# Altium PCB USB_Translator.PcbDoc
Units mm, origin at the board's own origin, x right, y up, seen from the top; angles counter-clockwise.
Board outline 14 x 10.7 mm, 2 copper layers (Top Layer, Bottom Layer); 2 components, 6 nets, 24 pads, 10 vias.
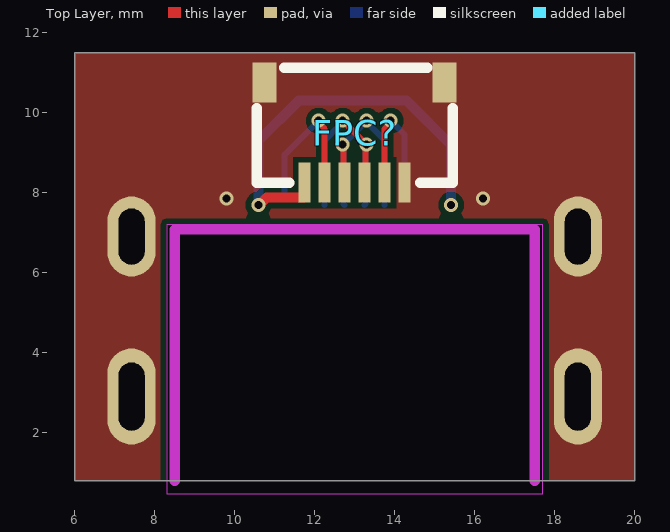
[diagram p0: Top Layer view]
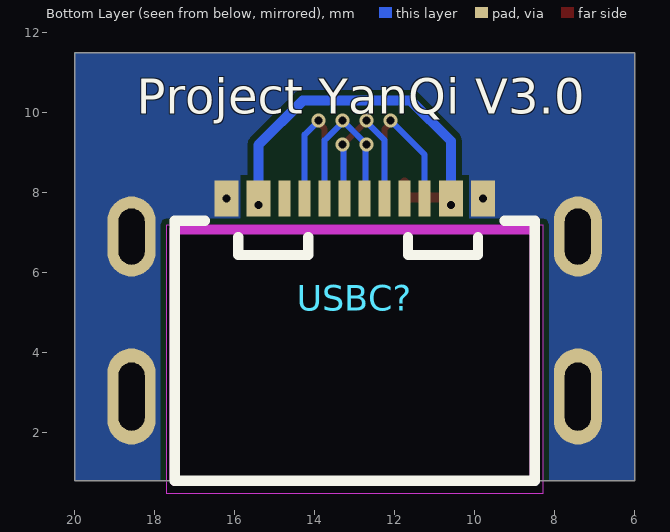
[diagram p1: Bottom Layer view, seen from below]

## Layer stack, top to bottom
Top Solder: solder mask 0.0102, Solder Resist, Dk 3.5
Top Layer: signal copper 0.0356
Dielectric 1: dielectric 0.32, FR-4, Dk 4.8
Bottom Layer: signal copper 0.0356
Bottom Solder: solder mask 0.0102, Solder Resist, Dk 3.5

## Board outline
6,0.8 20,0.8 20,11.5 6,11.5

## Design rules (kind name [scope] priority, off if disabled: settings)
Clearance Clearance_1 [OnMid vs OnMid] p1: gap=0.15 ignorepadtopadclearanceinfootprint=FALSE sourcerule=36 cellrowname=All cellrowtype=0 cellcolname=All cellcoltype=0 innerlayers=TRUE
Clearance Clearance_2 [(ExistsOnLayer('Top Layer') Or ExistsOnLayer('Bottom Layer')) vs (ExistsOnLayer('Top Layer') Or ExistsOnLayer('Bottom Layer'))] p2: gap=0.15 ignorepadtopadclearanceinfootprint=FALSE sourcerule=36 cellrowname=All cellrowtype=0 cellcolname=All cellcoltype=0 outerlayers=TRUE
Clearance [All] p3: gap=0.254 ignorepadtopadclearanceinfootprint=FALSE ismatrix=TRUE
PolygonConnect [All] p1: connectstyle=Direct reliefconductorwidth=0.254 reliefentries=4 polygonreliefangle="90 Angle" airgapwidth=0.254
RoutingVias [All] p1: holewidth=0.711 width=1.27 viastyle="Through Hole" minholewidth=0.711 minwidth=1.27 maxholewidth=0.711 maxwidth=1.27
SolderMaskExpansion [All] p1: expansion=0.102 istentingtop=FALSE
Width [All] p1: maxlimit=5 minlimit=0.15 preferedwidth=0.15 minimp=50.000000 maximp=50.000000 favimp=50.000000
30 further rules are at their usual default settings.

## Components (designator, comment, footprint, x,y, rotation, side; value= is the part's Value field where it differs from the comment)
FPC? "FH34SRJ-6S-0.5SH(50)" FFC-SMD_6P-P0.50_FH34SRJ-6S-0.5SH 13,9.5 r180 top locked
USBC? "918-418K2024S40000" USB-C-SMD_TYPE-C-USB-4 13,5.3 r180 bottom locked

## Footprints (in the part's own frame and the unit in brackets; to place one, negate y for a bottom-side part, rotate by r counter-clockwise, add the part's x,y. Pads: shape width x height; smd on the part's side, far side on the other; paste and mask are expansions set on the pad)
FFC-SMD_6P-P0.50_FH34SRJ-6S-0.5SH [mm]
  rect 0.3x1 smd: 1(1.25,1.25) 2(0.75,1.25) 3(0.25,1.25) 4(-0.25,1.25) 5(-0.75,1.25) 6(-1.25,1.25)
  rect 0.6x1 smd: 7(-2.25,-1.25) 8(2.25,-1.25)
  silkscreen extent -2.45,-1.63 2.45,1.25, body extent -2.5,-1.64 2.5,2.01, height 0.95
USB-C-SMD_TYPE-C-USB-4 [mm]
  oval 1.2x2 hole 0.65 slot 1.4 at 90 deg: 13(5.58,1.605) 16(-5.58,1.605)
  oval 1.2x2.4 hole 0.65 slot 1.7 at 90 deg: 14(5.58,-2.395) 15(-5.58,-2.395)
  rect 0.3x0.9 smd mask+0.051: A5(-1.25,2.55) A6(-0.25,2.55) A7(0.25,2.55) A8(1.25,2.55) B5(1.75,2.55) B6(0.75,2.55) B7(-0.75,2.55) B8(-1.75,2.55)
  rect 0.6x0.9 smd mask+0.051: A9B4(2.41,2.55) A12B1(3.21,2.55) B9A4(-2.41,2.55) B12A1(-3.21,2.55)
  Keep-Out Layer board cut-out: -4.699,-4.826 -4.699,1.905 4.699,1.905 4.699,-4.826
  Keep-Out Layer lines w0.254: 4.499,1.78 4.499,-4.501 4.499,1.78 ; 4.499,1.78 -4.5,1.78 ; -4.5,1.78 -4.5,-4.501 -4.5,1.78
  silkscreen extent -4.5,-4.5 4.5,2, body extent -5.77,-4.57 5.77,2.63, height 1.86

## Part data
FPC?: JLCPCB Part Class="Extended Part", LCSC Part Name="间距:0.5mm P数:6P 双侧触点/上下接", Manufacturer=HRS(广濑), Operating Temperature Range=-55℃~+105℃, Soldering Temperature(Max)=-, Add into BOM=yes, Contact Material=磷青铜, Contact Plating=金, Contact Type=双侧触点/上下接, Convert to PCB=yes, Datasheet=https://atta.szlcsc.com/upload/public/pdf/source/20180712/C224194_08937A353F43080B85824A8384727686.pdf, Device=FH34SRJ-6S-0.5SH(50), FFC, FCB Thickness=0.3mm, Height Above Board=1mm, Locking Feature=-, Manufacturer Part=FH34SRJ-6S-0.5SH(50), Mounting Type=卧贴, Number of Contacts=6P, Pitch=0.5mm, Supplier=LCSC, Supplier Footprint=SMD,P=0.5mm,卧贴, Supplier Part=C224194, Symbol=FH34SRJ-6S-0.5SH(50)
USBC?: JLCPCB Part Class="Extended Part", LCSC Part Name="Type-C 母座", Manufacturer=精拓金, Add into BOM=yes, Connector Type=Type-C, Convert to PCB=yes, Datasheet=https://atta.szlcsc.com/upload/public/pdf/source/20230504/AD68741A173EB676C7BDD03FFA4DE90F.pdf, Device=918-418K2024S40000, Gender=母座, Manufacturer Part=918-418K2024S40000, Name=918-418K2024S40000, Number of Contacts=16P, Number of Ports=1, Standard=-, Supplier=LCSC, Supplier Footprint=SMD, Supplier Part=C168688, Symbol="TYPE-C 3.1 MT 16P_C168688"

## Via types
v1: diameter 0.35, hole 0.2, Top Layer to Bottom Layer, tented both sides, 10 vias

## Nets (pads, with @x,y where several pads share a name; then routed paths per layer and width w, separated by ;. In a path a pad name is that pad's centre, name@x,y a point inside that pad or via, vN(x,y) a via of type N, cw(c..) or ccw(c..) an arc to the next point about the centre after c; other vN are vias at no path point)
GND: FPC?.6 FPC?.7 FPC?.8 USBC?.13 USBC?.14 USBC?.15 USBC?.16 USBC?.A12B1 USBC?.B12A1
  other v1: 9.79,7.85 16.21,7.85
USB_5V: FPC?.1 USBC?.A9B4 USBC?.B9A4 | length 10.4
  Top Layer w0.25: v1(10.59,7.695) 10.617,7.695 10.797,7.875 11.725,7.875 11.75,7.9 FPC?.1
  Bottom Layer w0.25: v1(10.59,7.695) USBC?.A9B4 10.59,9.29 11.6,10.3 14.3,10.3 15.41,9.19 USBC?.B9A4 v1(15.41,7.695)
USB_CC1: FPC?.5 USBC?.A5 | length 3.7
  Top Layer w0.15: FPC?.5 13.75,9.596 13.9,9.746 v1(13.9,9.8)
  Bottom Layer w0.15: v1(13.9,9.8) 14.25,9.45 USBC?.A5
USB_CC2: FPC?.2 USBC?.B5 | length 3.9
  Top Layer w0.15: v1(12.1,9.8) 12.14,9.76 12.138,9.758 12.138,9.708 12.25,9.596 FPC?.2
  Bottom Layer w0.15: USBC?.B5 11.25,8.95 v1(12.1,9.8)
USB_D+: FPC?.4 USBC?.A6 USBC?.B6 | length 5.6
  Top Layer w0.15: v1(12.7,9.8) v1(13.3,9.2) 13.275,9.175 13.275,8.275 FPC?.4
  Bottom Layer w0.15: USBC?.B6@12.25,7.695 12.25,9.316 12.7,9.766 v1(12.7,9.8) ; USBC?.A6@13.25,7.695 13.275,7.72 13.275,9.175 v1(13.3,9.2)
USB_D-: FPC?.3 USBC?.A7 USBC?.B7 | length 5.6
  Top Layer w0.15: v1(12.7,9.2) 12.725,9.175 12.725,8.275 FPC?.3
  Bottom Layer w0.15: USBC?.A7@12.75,7.693 12.725,7.718 12.725,9.175 v1(12.7,9.2) v1(13.3,9.8) 13.3,9.766 13.75,9.316 USBC?.B7@13.75,7.693
pads on no net: USBC?.A8 USBC?.B8

## Polygon pours and split planes (outlines as drawn)
GND on Top Layer "NONET_L-01_P-001" (solid, pour order 0): 6,11.5 20,11.5 20,0.8 6,0.8
GND on Bottom Layer "NONET_L-01_P-001" (solid, pour order 1): 6,11.5 20,11.5 20,0.8 6,0.8

## Silkscreen, mask and mechanical layers (free items; w line width, h text height)
Bottom Overlay:
  text "Project YanQi V3.0" at 18.448,9.688 h1.5
Mechanical 1:
  the board outline again, w0.1